# Altium PCB jetson_nano_breakout_rev1.PcbDoc
Units mil, origin at the board's own origin, x right, y up, seen from the top; angles counter-clockwise.
Board outline 3926.51 x 3520 mil, 2 copper layers (Top Layer, Bottom Layer); 35 components, 48 nets, 168 pads, 31 vias.
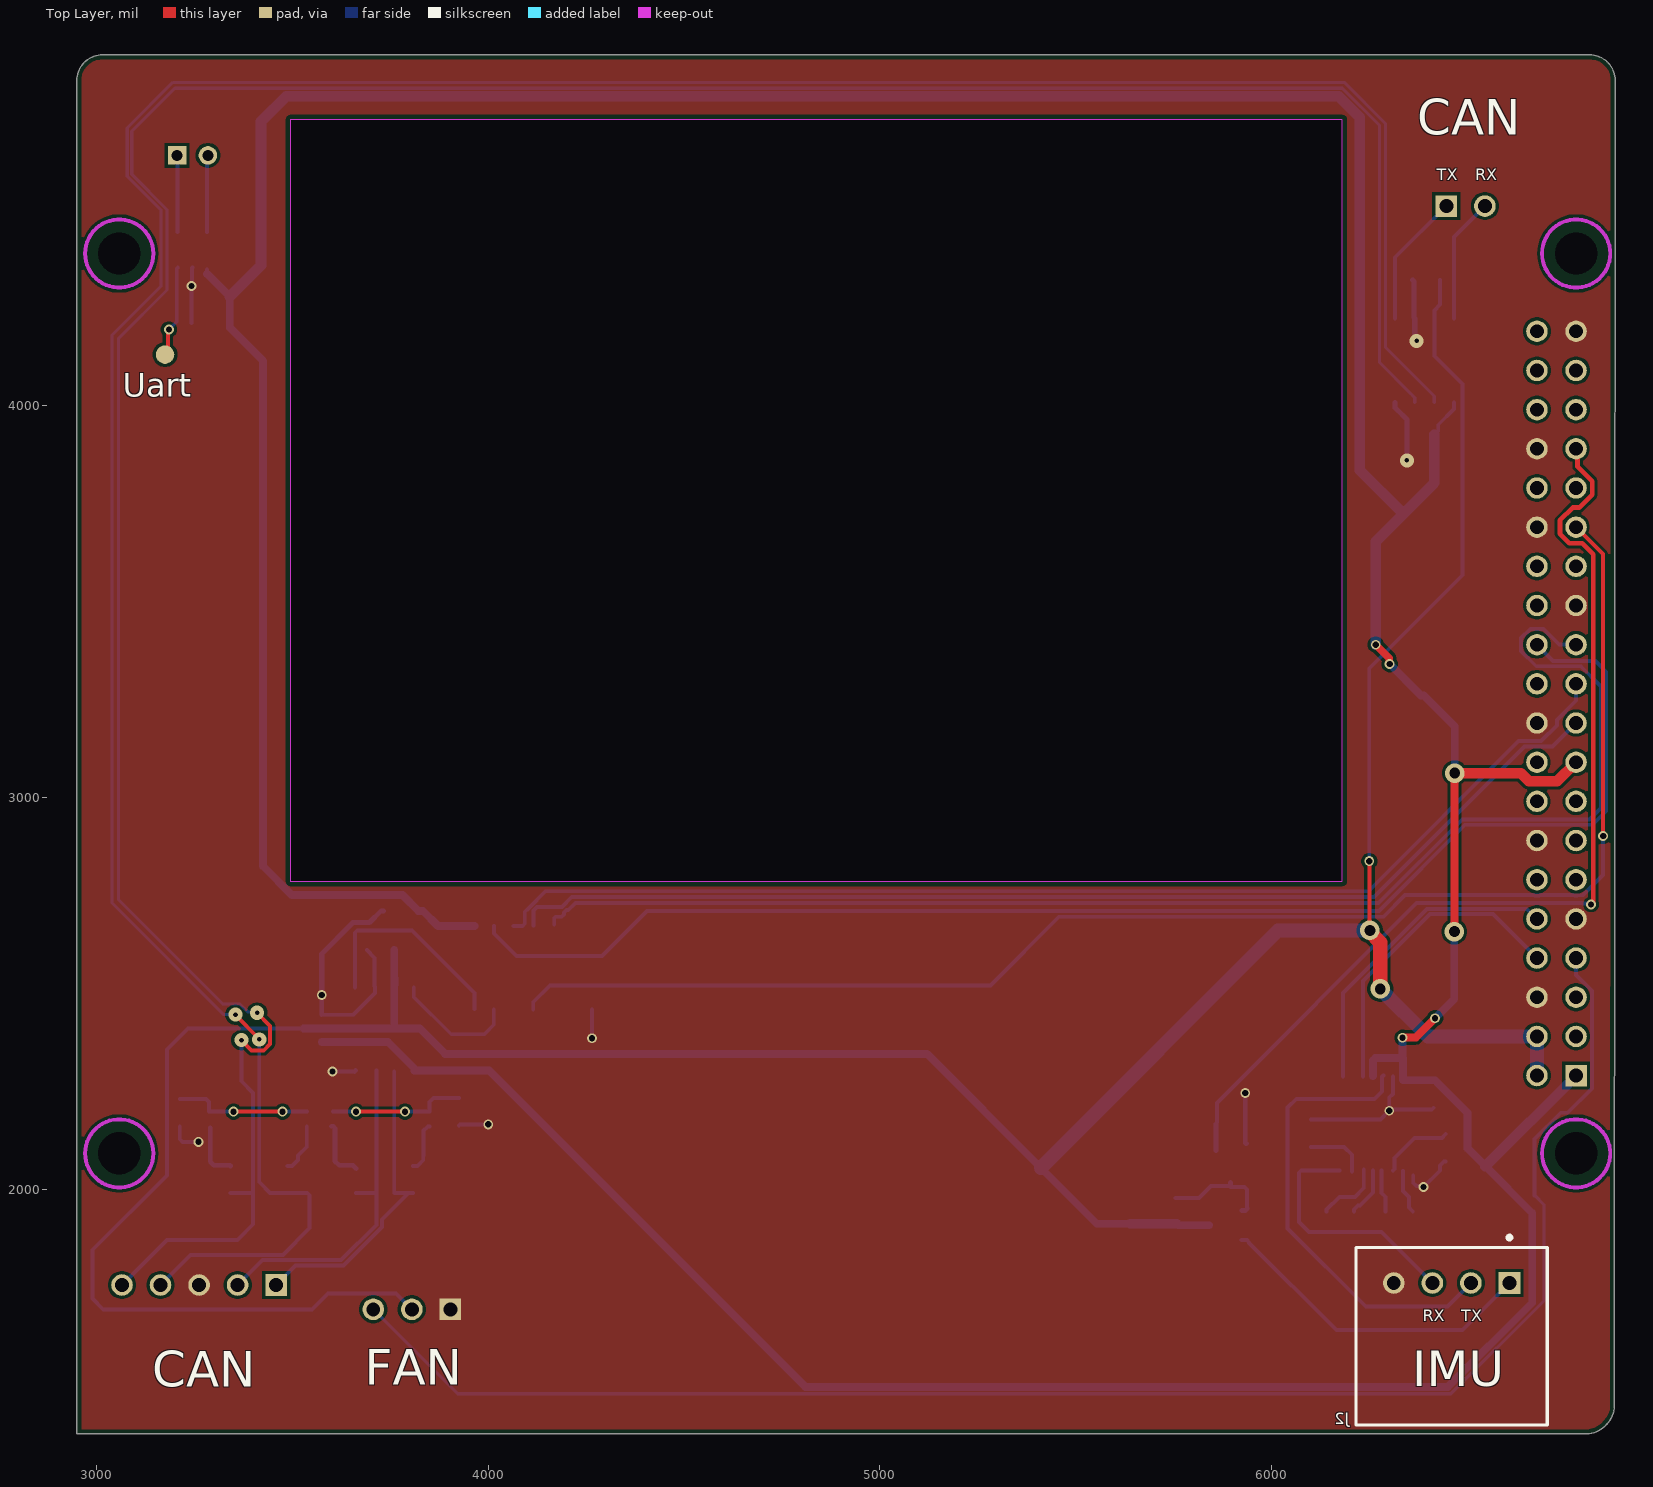
[diagram p0: Top Layer view]
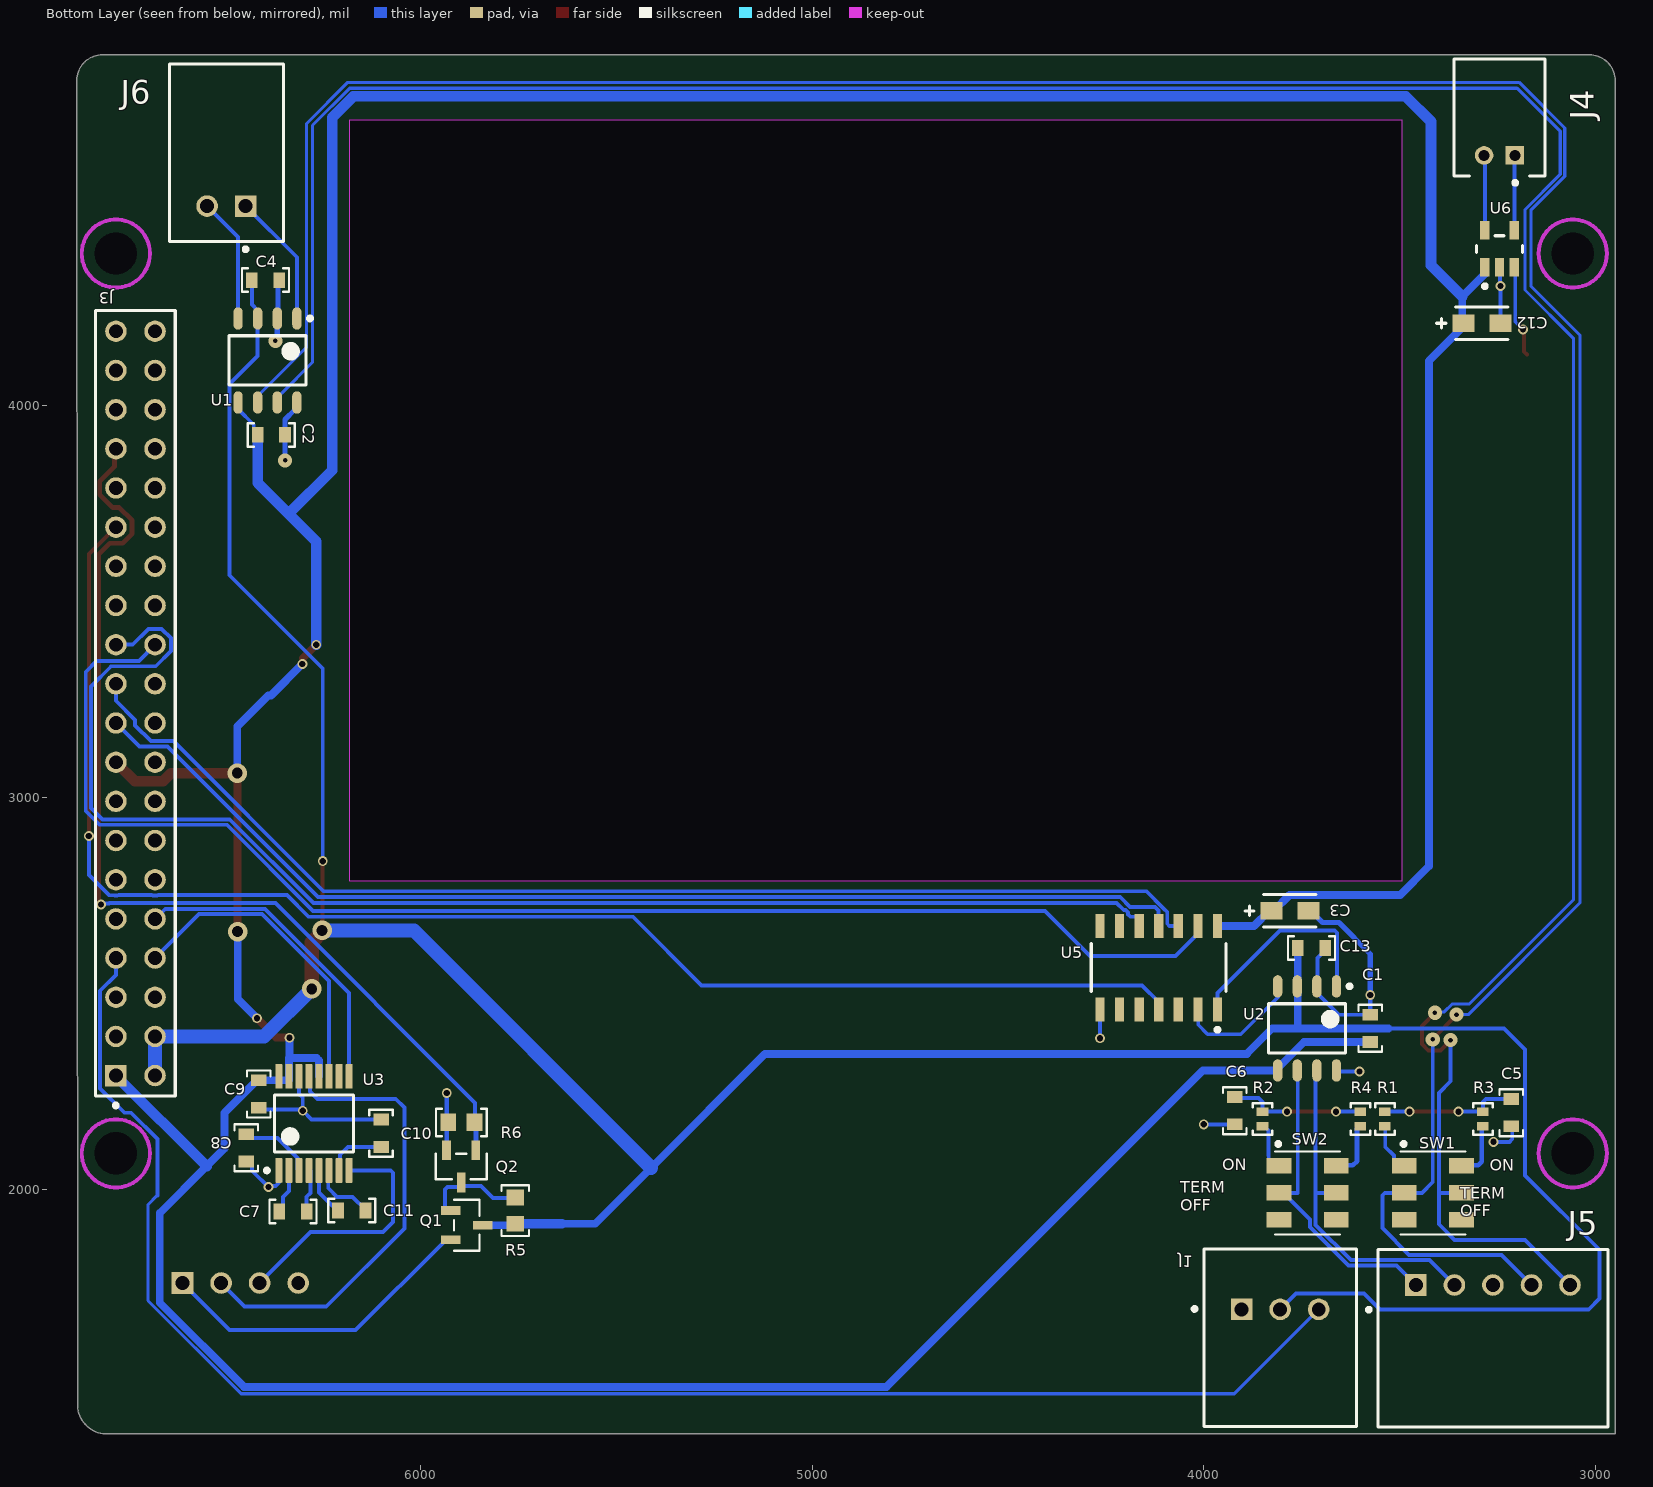
[diagram p1: Bottom Layer view, seen from below]
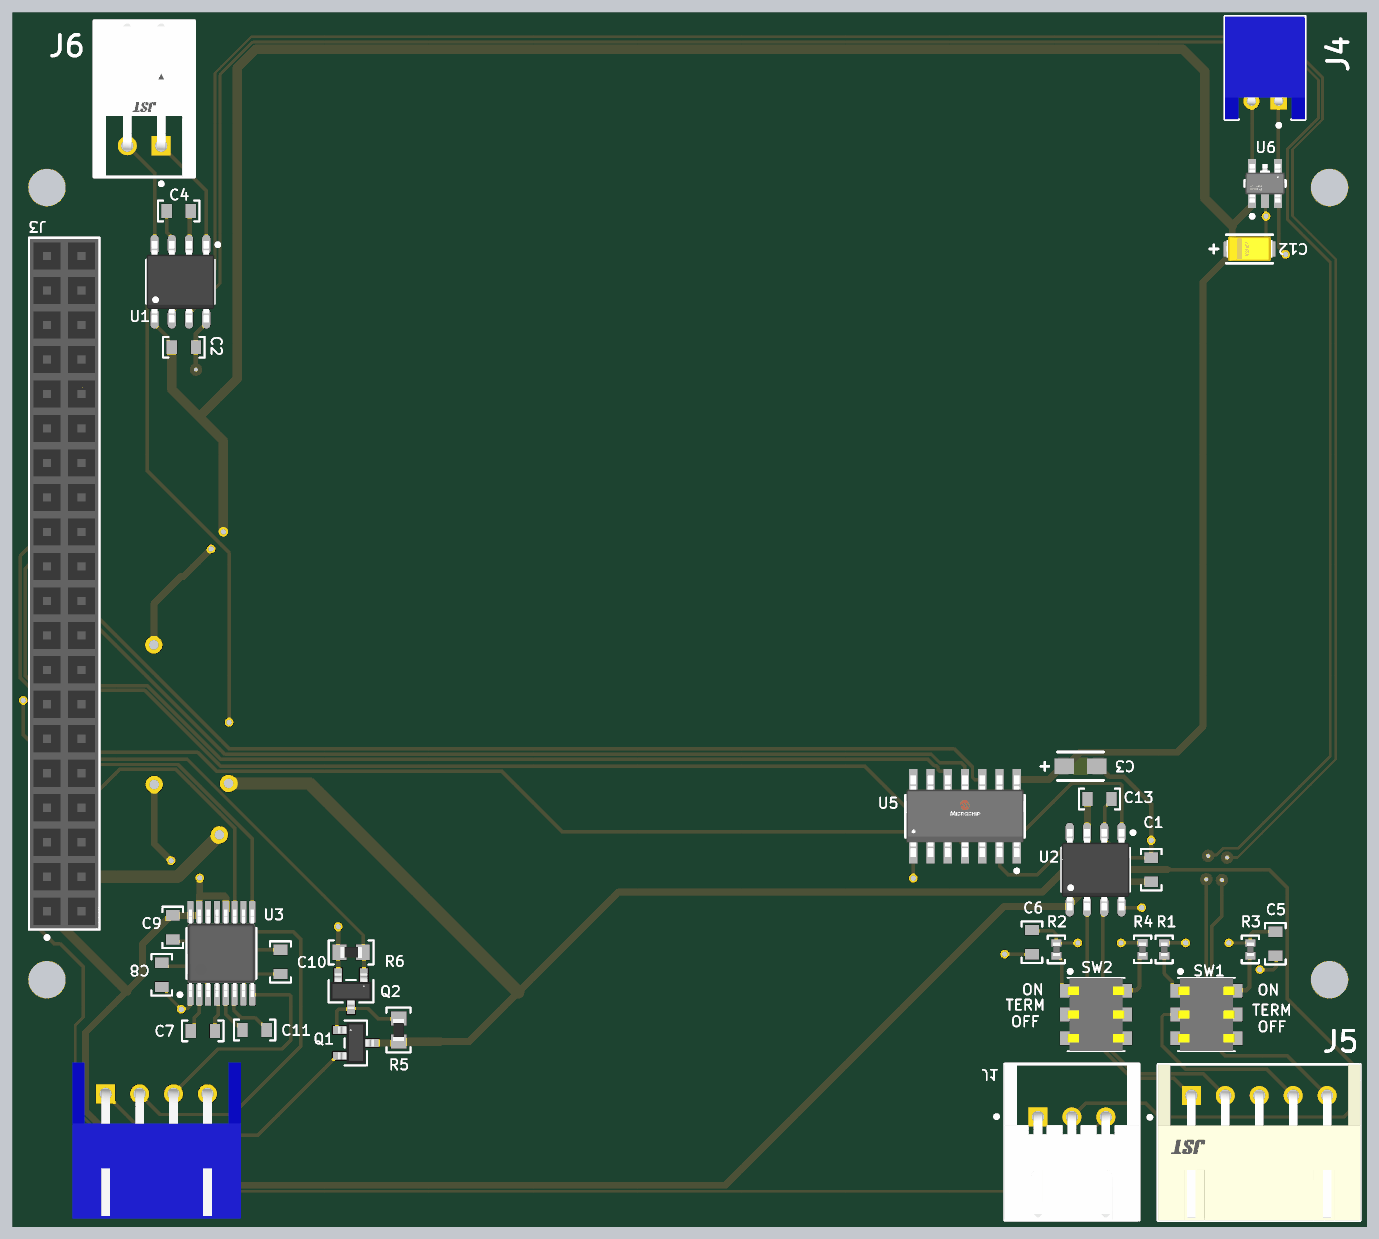
[diagram p2: 3D render of the assembled board from below, using the file's embedded part models]

## Layer stack, top to bottom
Top Solder: solder mask 0.4, Solder Resist, Dk 3.5
Top Layer: signal copper 1.4
Dielectric 1: dielectric 12.6, FR-4, Dk 4.8
Bottom Layer: signal copper 1.4
Bottom Solder: solder mask 0.4, Solder Resist, Dk 3.5

## Board outline
3015,4895 ccw(c3015,4830) 2950,4830 2950,1375 6810,1375 ccw(c6797.61,1452.38) 6874.99,1439.99 6876.5,4830.49 ccw(c6812,4830.5) 6812,4895
cut-out: 3495,4730 3495,2785 6180,2785 6180,4730

## Design rules (kind name [scope] priority, off if disabled: settings)
AcuteAngle [All] p1: minimum=8.00000000000000E+0001 checktracksonly=FALSE
BoardOutlineClearance "BoardOutlineClearance JLCPCB" [All] p1: gap=11.81 ignorepadtopadclearanceinfootprint=FALSE
Clearance "Clearance JLCPCB 4 layer" [All] p1: gap=7.87 ignorepadtopadclearanceinfootprint=FALSE except(3.54: Arc-Arc Arc-Track Track-Track; 5: Arc-SMDPad Arc-Via Track-SMDPad Track-Via SMDPad-SMDPad; 9.45: THPad-THPad THPad-Via Via-Via; 10: Arc-Hole Track-Hole SMDPad-Hole THPad-Hole Via-Hole Fill-Hole Poly-Hole Region-Hole Text-Hole)
DiffPairsRouting "Diff Pairs USB 2.0" [InDifferentialPairClass('USB 2.0')] p1: maxlimit=5 minlimit=5 mostfreqgap=5 toplayer_minwidth=7.87 toplayer_maxwidth=7.87 toplayer_prefwidth=7.87 bottomlayer_minwidth=7.87 bottomlayer_maxwidth=7.87 bottomlayer_prefwidth=7.87 impedanceprofiledriven=TRUE impedanceprofileid={9C1C01C3-81FD-4AE1-9E3D-BC841176F5CA} maxuncoupledlength=500
DiffPairsRouting "Diff Pairs PCIe Gen 2" [InDifferentialPairClass('PCIe Gen 2')] p2: maxlimit=5 minlimit=5 mostfreqgap=5 toplayer_minwidth=5.53 toplayer_maxwidth=5.53 toplayer_prefwidth=5.53 bottomlayer_minwidth=5.53 bottomlayer_maxwidth=5.53 bottomlayer_prefwidth=5.53 impedanceprofiledriven=TRUE impedanceprofileid={D86E5A41-F98B-413D-93FD-A6E48D035561} maxuncoupledlength=500
HoleSize "HoleSize JLCPCB Pad" [IsPad] p1: absolutevalues=TRUE maxlimit=248.03 minlimit=19.68 maxpercent=80.000 minpercent=20.000
HoleSize "HoleSize JLCPCB 4 layer Cheap" [All] p2: absolutevalues=TRUE maxlimit=248.03 minlimit=11.81 maxpercent=80.000 minpercent=20.000
HoleToHoleClearance "HoleToHoleClearance JLCPCB Same Net" [All] p1: gap=10 allowstackedmicrovias=TRUE
MinimumAnnularRing "MinimumAnnularRing JLCPCB Via" [All] p1: minimumring=2.95
MinimumAnnularRing "MinimumAnnularRing JLCPCB Pad" [IsPad] p2: minimumring=9.84
MinimumAnnularRing "MinimumAnnularRing JLCPCB 1oz" [All] p3: minimumring=5.12
MinimumSolderMaskSliver "MinimumSolderMaskSliver JLCPCB" [All] p1: minsoldermaskwidth=3.94
PlaneClearance [All] p1: clearance=11.81
PlaneConnect [All] p1: planeconnectstyle=Direct reliefexpansion=20 reliefentries=4 reliefconductorwidth=10 reliefairgap=10
PolygonConnect [All] p1: connectstyle=Direct reliefconductorwidth=15 reliefentries=4 polygonreliefangle="45 Angle" airgapwidth=10
RoutingVias "RoutingVias JLCPCB 4 layer" [All] p1: holewidth=19.68 width=39.37 viastyle="Through Hole" minholewidth=11.81 minwidth=17.72 maxholewidth=50 maxwidth=80 useviatemplates=TRUE viatemplateguid#1={E4F56293-08C2-4D19-82C4-AE08438917D5} viatemplateguid#2={1BCA9F14-5F09-4202-A85E-663B4EEF2BCF} viatemplateguid#3={0A06A7A9-53EB-413F-AE2C-1D9530B3FFA7} viatemplatename#1=v64h41 viatemplatename#2=v127h71 viatemplatename#3=v274h274
SilkToSilkClearance [All] p1: silktosilkclearance=3
SilkToSolderMaskClearance "SilkToSolderMaskClearance JLCPCB" [IsPad] p1: minsilkscreentomaskgap=5.91 clearancetoexposedcopper=TRUE
SolderMaskExpansion "SolderMaskExpansion JLCPCB" [All] p1: expansion=1.5 istentingtop=FALSE
SupplyNets "Schematic Supply Nets_2" [InNet('+5')] p1: voltage=0.000
SupplyNets "Schematic Supply Nets_1" [InNet('3v3')] p2: voltage=0.000
SupplyNets "Schematic Supply Nets" [InNet('GND')] p3: voltage=0.000
UnRoutedNet [All] p1: checkbadconnections=TRUE
Width "Width JLCPCB 4 layer" [All] p1: maxlimit=196.85 minlimit=3.54 preferedwidth=9.84 minimp=50.000000 maximp=50.000000 favimp=50.000000
21 further rules are at their usual default settings.

## Components (designator, comment, footprint, x,y, rotation, side; value= is the part's Value field where it differs from the comment)
C1 "1uF Ceramic 16V" CAPACITOR_0603 3575,2410 r90 bottom value=1uF
C2 "1uF Ceramic 16V" CAPACITOR_0603 6380,3925 r180 bottom value=1uF
C3 "10uF Ceramic 6.3V" CAPACITOR_0603 3725,2615 r180 bottom
C4 "10uF Ceramic 6.3V" CAPACITOR_0603 6395,4320 r180 bottom
C5 "10nF Ceramic 6.3V" CAPACITOR_0603 3215,2195 r90 bottom value=10nF
C6 "10nF Ceramic 6.3V" CAPACITOR_0603 3921.01,2200 r90 bottom value=10nF
C7 "100nF Ceramic 6.3V" CAPACITOR_0603 6325,1942.5 r180 bottom value=0.1uF
C8 "100nF Ceramic 6.3V" CAPACITOR_0603 6444.29,2105 r270 bottom value=0.1uF
C9 "100nF Ceramic 6.3V" CAPACITOR_0603 6412.5,2242.5 r270 bottom value=0.1uF
C10 "100nF Ceramic 6.3V" CAPACITOR_0603 6100,2142.5 r90 bottom value=0.1uF
C11 "100nF Ceramic 6.3V" CAPACITOR_0603 6175,1945 r180 bottom value=0.1uF
C12 "T491A104K035AT" FP-T491A104K035AT-MFG 3290,4210 r0 bottom
C13 "T491A104K035AT" FP-T491A104K035AT-MFG 3780,2710 r0 bottom
J1 "S3B-XH-A-1(LF)(SN)" FP-S3B-XH-A-1_LF_SN-MFG 3805,1620 r0 bottom
J2 "S4B-XH-A(LF)(SN)" JST-S4B-XH-A(LF)(SN)_V 6459.21,1760 r180 top
J3 "7-534206-0" FP-7-534206-0-MFG 6727,3239.5 r90 bottom
J4 "S2B-PH-K-S(LF)(SN)" JST-S2B-PH-K-S_V 3245,4735 r0 bottom
J5 "S5B-XH-A(LF)(SN)" FP-S5B-XH-A_LF_SN-MFG 3261.85,1619.17 r0 bottom
J6 "S2B-XH-A-GU" FP-S2B-XH-A-GU-MFG 6495,4645 r0 bottom
Q1 "MOSFET N-CH 30V 5.8A SOT-23-3" SOT-23-3 5881.35,1907.5 r270 bottom
Q2 "MOSFET N-CH 30V 5.8A SOT-23-3" SOT-23-3 5895.48,2057.5 r0 bottom
R1 "60.4 Ohm 1% 1/16W" RESISTOR_0402 3537.5,2178.7 r90 bottom
R2 "60.4 Ohm 1% 1/16W" RESISTOR_0402 3850,2178.7 r90 bottom
R3 "60.4 Ohm 1% 1/16W" RESISTOR_0402 3287.5,2178.7 r90 bottom
R4 "60.4 Ohm 1% 1/16W" RESISTOR_0402 3600,2178.8 r90 bottom
R5 "10k Ohm 5% 1/10W" RESISTOR_0603 5757.5,1945 r90 bottom
R6 "10k Ohm 5% 1/10W" RESISTOR_0603 5895,2170 r0 bottom
SW1 "Switch DPDT" CAS-220TA 3415,1990 r270 bottom
SW2 "Switch DPDT" CAS-220TA 3735,1990 r270 bottom
U1 "CAN Transceiver" SOIC-8 6390,4115 r270 bottom
U2 "CAN Transceiver" SOIC-8 3736.32,2410 r270 bottom
U3 "SN65C3221EPWR" PW0016A_M 6271.36,2167.5 r90 bottom
U5 "MCP2517FD-H/SL" FP-C04-065-SL-MFG 4115,2565 r90 bottom
U6 "ISL3280EIHZ-T" FP-P5_064-MFG 3245,4400 r90 bottom
Uart "Comment" TESTPOINT_1.2MM 3175,4130 r0 top

## Footprints (in the part's own frame and the unit in brackets; to place one, negate y for a bottom-side part, rotate by r counter-clockwise, add the part's x,y. Pads: shape width x height; smd on the part's side, far side on the other; paste and mask are expansions set on the pad)
CAPACITOR_0603 [mil] "CAPACITOR 0603"
  rect 30x40 smd: 1(-35,0) 2(35,0)
  silkscreen extent -60,-30 60,30, body extent -94,-16 -31,16, height 31
CAS-220TA [mm] "SWITCH SLIDE DPDT 100MA 6V"
  rrect0% 1x1.6 smd: 1(-1.75,-1.85) 2(0,-1.85) 3(1.75,-1.85) 4(-1.75,1.85) 5(0,1.85) 6(1.75,1.85)
  silkscreen extent -3.3,-2.1 2.7,2.1, body extent -2.7,-2.1 2.7,2.1, height 5.01
FP-7-534206-0-MFG [mm]
  rect 1.39x1.39 hole 0.89 paste-2539.97 mask+0: 1(-24.13,1.27)
  round 1.39 hole 0.89 paste-2539.97 mask+0: 2(-24.13,-1.27) 3(-21.59,1.27) 4(-21.59,-1.27) 5(-19.05,1.27) 6(-19.05,-1.27) 7(-16.51,1.27) 8(-16.51,-1.27) 9(-13.97,1.27) 10(-13.97,-1.27) 11(-11.43,1.27) 12(-11.43,-1.27) 13(-8.89,1.27) 14(-8.89,-1.27) 15(-6.35,1.27) 16(-6.35,-1.27) 17(-3.81,1.27) 18(-3.81,-1.27) 19(-1.27,1.27) 20(-1.27,-1.27) 21(1.27,1.27) 22(1.27,-1.27) 23(3.81,1.27) 24(3.81,-1.27) 25(6.35,1.27) 26(6.35,-1.27) 27(8.89,1.27) 28(8.89,-1.27) 29(11.43,1.27) 30(11.43,-1.27) 31(13.97,1.27) 32(13.97,-1.27) 33(16.51,1.27) 34(16.51,-1.27) 35(19.05,1.27) 36(19.05,-1.27) 37(21.59,1.27) 38(21.59,-1.27) 39(24.13,1.27) 40(24.13,-1.27)
  silkscreen extent -26.19,-2.58 25.47,2.58, body extent -25.4,-2.52 25.4,2.52, height 8.64
FP-C04-065-SL-MFG [mm]
  rect 1.55x0.6 smd paste+0 mask+0: 1(-2.7,-3.81) 2(-2.7,-2.54) 3(-2.7,-1.27) 4(-2.7,0) 5(-2.7,1.27) 6(-2.7,2.54) 7(-2.7,3.81) 8(2.7,3.81) 9(2.7,2.54) 10(2.7,1.27) 11(2.7,0) 12(2.7,-1.27) 13(2.7,-2.54) 14(2.7,-3.81)
  silkscreen extent -4.15,-4.38 1.55,4.38, body extent -3,-4.33 3,4.33, height 1.75
FP-P5_064-MFG [mm]
  rect 1.2x0.6 smd paste+0 mask+0: 1(-1.2,0.95) 2(-1.2,0) 3(-1.2,-0.95) 4(1.2,-0.95) 5(1.2,0.95)
  silkscreen extent -2.55,-1.5 0.85,1.5, body extent -1.42,-1.45 1.42,1.45, height 1.45
FP-S2B-XH-A-GU-MFG [mm]
  rect 1.4x1.4 hole 0.9 paste-2539.97 mask+0: 1(-1.25,3.45)
  round 1.4 hole 0.9 paste-2539.97 mask+0: 2(1.25,3.45)
  silkscreen extent -3.7,-5.75 3.7,6.37, body extent -3.7,-5.75 3.7,5.75, height 5.95
FP-S3B-XH-A-1_LF_SN-MFG [mm]
  rect 1.4x1.4 hole 0.9 paste-2539.97 mask+0: 1(2.5,-1.85)
  round 1.4 hole 0.9 paste-2539.97 mask+0: 2(0,-1.85) 3(-2.5,-1.85)
  silkscreen extent -4.95,-5.75 5.68,5.75, body extent -4.95,-5.75 4.95,5.75, height 6.1
FP-S5B-XH-A_LF_SN-MFG [mm]
  rect 1.4x1.4 hole 0.9 paste-2539.97 mask+0: 1(5,-3.45)
  round 1.4 hole 0.9 paste-2539.97 mask+0: 2(2.5,-3.45) 3(0,-3.45) 4(-2.5,-3.45) 5(-5,-3.45)
  silkscreen extent -7.45,-5.75 8.18,5.75, body extent -7.45,-5.75 7.45,5.75, height 6.15
FP-T491A104K035AT-MFG [mm]
  rect 1.42x1.13 smd paste+0 mask+0: 1(-1.2,0) 2(1.2,0)
  silkscreen extent -1.7,-1.05 2.93,1.05, body extent -1.7,-0.9 1.7,0.9, height 1.8
JST-S2B-PH-K-S_V [mm] "THD, 2-Leads, Body 7.6x5.9mm, Pitch 2mm"
  rect 1.2x1.2 hole 0.7: 1(-1,2.45)
  round 1.2 hole 0.7: 2(1,2.45)
  silkscreen extent -2.95,-3.8 2.95,4.35, body extent -2.95,-3.8 2.95,3.8, height 4.8
JST-S4B-XH-A(LF)(SN)_V [mm] "Header, 4-Leads, Body 12.4x11.5mm, Pitch 2.5mm"
  rect 1.4x1.4 hole 0.9: 1(-3.75,0)
  round 1.4 hole 0.9: 2(-1.25,0) 3(1.25,0) 4(3.75,0)
  silkscreen extent -6.2,-3.08 6.2,9.2, body extent -6.2,-2.3 6.2,9.2, height 3.4
PW0016A_M [mm] "SOP, 16-Leads, Body 5.1x4.5mm, Pitch 0.65mm, IPC Low Density"
  rrect22% 1.6x0.45 smd: 1(-3.05,2.275) 2(-3.05,1.625) 3(-3.05,0.975) 4(-3.05,0.325) 5(-3.05,-0.325) 6(-3.05,-0.975) 7(-3.05,-1.625) 8(-3.05,-2.275) 9(3.05,-2.275) 10(3.05,-1.625) 11(3.05,-0.975) 12(3.05,-0.325) 13(3.05,0.325) 14(3.05,0.975) 15(3.05,1.625) 16(3.05,2.275)
  silkscreen extent -3.17,-2.55 1.85,3.18, body extent -3.21,-2.5 3.21,2.5, height 1
RESISTOR_0402 [mm] "Resistor 0402"
  rect 0.55x0.75 smd: 1(-0.475,0) 2(0.475,0)
  silkscreen extent -1.02,-0.64 1.02,0.64, body extent -0.5,-0.25 0.5,0.25, height 0.25
RESISTOR_0603 [mil] "Resistor 0603"
  rect 40x45 smd: 1(-33.5,0) 2(33.5,0)
  silkscreen extent -65,-35 65,35, body extent -31,-16 31,16, height 16
SOIC-8 [mm] "SOIC, 8-Leads, Body 4.90x3.90mm, Pitch 1.27mm, IPC Medium Density"
  oval 1.45x0.6 smd: 1(-2.725,1.905) 2(-2.725,0.635) 3(-2.725,-0.635) 4(-2.725,-1.905) 5(2.725,-1.905) 6(2.725,-0.635) 7(2.725,0.635) 8(2.725,1.905)
  silkscreen extent -2.85,-2.5 1.6,2.88, body extent -3,-2.5 3,2.5, height 1.75
SOT-23-3 [mil]
  rect 22x50 smd paste+0 mask+4: 1(-37.5,-41) 2(37.5,-41) 3(0,41)
  silkscreen extent -65,-33 65,33, body extent -60,-52 60,52, height 44
TESTPOINT_1.2MM [mm]
  round 1.2 smd: TP(0,0)

## Part data
C1 C2: library part CAPACITOR_1uF_0603, "Cap 1uF 16V +/-10% / Ceramic 0603", Supplier Part Number 1=399-7847-1-ND, Tolerance="+/- 10%", Voltage=16V, Made By="Flip B", Supplier 1=Digi-Key
C3 C4: library part CAPACITOR_10uF_0603, "Cap 10uF 6.3V +/-20% / Ceramic 0603", Supplier Part Number 1=1276-1119-1-ND, Tolerance="+/- 20%", Value (uF)="10 uF", Voltage=6.3V, ComponentLink1Description=Digikey, ComponentLink1URL=https://www.digikey.com/en/products/detail/samsung-electro-mechanics/CL10A106MQ8NNNC/3886777, Made By="Flip B", Supplier 1=Digi-Key
C5 C6: library part CAPACITOR_0.01uF_0603, "Cap 10nF 6.3V +/-20% / Ceramic 0603", Supplier Part Number 1=80-C0603C103K9R, Tolerance="+/- 10%", Voltage=6.3V, ComponentLink1Description=Datsheet, ComponentLink1URL=https://www.mouser.com/datasheet/2/212/KEM_C1002_X7R_SMD-1102033.pdf, Made By="Flip B", Supplier 1=Mouser
C7 C8 C9 C10 C11: library part CAPACITOR_0.1uF_0603, "Cap 100nF 6.3V +/-10% / Ceramic 0603", Supplier Part Number 1=399-15351-1-ND, Tolerance="+/- 10%", Voltage=6.3V, ComponentLink1Description=Datsheet, ComponentLink1URL=https://www.mouser.com/datasheet/2/212/KEM_C1002_X7R_SMD-1102033.pdf, Made By="Flip B", Supplier 1=Digi-Key
C12 C13: library part CMP-03017-000018-1, "CAP TANT 0.1UF 10% 35V 1206", Capacitance=100nF, Case Code (Imperial)=1206, Case Code (Metric)=3216, Dielectric Material=Tantalum, ESR (Equivalent Series Resistance)=20R, Leakage Current=500nA, Max Operating Temperature=125°C, Min Operating Temperature=-55°C, Package Quantity=1, Ripple Current=61mA, Tolerance=10%, Voltage=35V, Case/Package=1206, Construction=Flat, Depth=1.6mm, Dissipation Factor=4%, Features="General Purpose", Height=1.6mm, Height - Seated (Max)=0.071inch, Lead Free="Lead Free", Lead Pitch=1.2mm, Length=3.2mm, Life (Hours)=2000Hour, Mount="Surface Mount", Number of Pins=2, Packaging="Tape and Reel", Polarity=Polar, Radiation Hardening=No, REACH SVHC="No SVHC", RoHS Compliant=Yes, Series=T491, Size=1.6mm, Termination=SMD/SMT, Voltage Rating=35V, Voltage Rating (DC)=35V, Weight=0.000571oz, Width=1.6mm
J1: library part CMP-17439-000427-1, "CONN HEADER R/A 3POS 2.5MM", Color=Natural, Flammability Rating="UL94 V-0", Max Operating Temperature=85°C, Min Operating Temperature=-25°C, Package Quantity=1000, Voltage Rating=250V, Connector Type=Header, Contact Finish - Mating=TIN, Contact Material=Brass, Contact Plating=Tin, Contact Shape=Square, Contact Type="Male Pin", Fastening Type=Detent, Insulation Color=Natural, Insulation Material=Nylon, Lead Free="Lead Free", Mount="Through Hole", Number of Positions=3, Number of Rows=1, Packaging=Bulk, Pitch=0.098inch, Series=XH, Termination=Press-Fit
J2: library part CMP-1755-00007-1, "Male Header, Pitch 2.5 mm, 1 x 4 Position, Height 6.1 mm, Tail Length 3.4 mm, -25 to 85 degC, RoHS, Bulk", ComponentLink1Description="Manufacturer URL", ComponentLink1URL=http://www.jst.com/home2.html, ComponentLink2Description=Datasheet, ComponentLink2URL=http://www.jst-mfg.com/product/pdf/eng/eXH.pdf, DatasheetVersion=May-16, PackageDescription="Male Header, Pitch 2.5 mm, 1 x 4 Position, Height 6.1 mm, Tail Length 3.4 mm", PackageReference=S4B-XH-A(LF)(SN)
J3: library part CMP-03369-000068-1, "CONN RCPT 40POS 0.1 GOLD PCB", Current Rating=2A, Manufacturer="TE Connectivity", Temperature="-65°C to +105°C", Temperature Range High=+105°C, Temperature Range Low=-65°C, Voltage Rating=333V, Automotive=No, Category=Conn, ComponentLink2Description=Datasheet, ComponentLink2URL=https://octopart.com/datasheet/7-534206-0-te+connectivity-39516831, Conn Gender=Female, Conn Orientation=Vertical, Contact Material=Gold,Nickel, Device Class L1=Connectors, Device Class L2="Headers and Wire Housings", Device Class L3=unset, Digikey Description="CONN RCPT 40POS 0.1 GOLD PCB", Footprint Url=https://www.mouser.in/datasheet/2/418/NG_CD_534206_R7-1252933.pdf, Height=8.9mm, Is Female=yes, Lead Free=Yes, Manufacturer Part Number=7-534206-0, Mouser Description="Headers & Wire Housings REC 2X20P VRT T/H", Number of Contacts=40, Number of Rows=2, Octopart=https://octopart.com/7-534206-0-te+connectivity-39516831, Package=7-534206-0, Pitch=2.54mm, RoHS=TRUE, Standoff Height=0.38mm
J4: library part CMP-1755-00004-1, "Male Header, Pitch 2 mm, 1 x 2 Position, Height 4.8 mm, Tail Length 3.4 mm, -25 to 85 degC, RoHS, Bulk", Capacitance="10 uF", Case\Package=Radial, Max Operating Temperature="85 degC", Min Operating Temperature="-40 degC", Package Quantity=200, Tolerance=20%, Voltage Rating="50 V", ComponentLink1Description=Datasheet, ComponentLink1URL=http://www.jst-mfg.com/product/pdf/eng/ePH.pdf, DatasheetVersion=Dec-12, Diameter="5 mm", Height="11 mm", Lead Pitch="2 mm", Length="11 mm", Mount="Through Hole", PackageDescription="Male Header, Pitch 2 mm, 1 x 2 Position, Height 4.8 mm, Tail Length 3.4 mm", PackageReference=S2B-PH-K-S, Packaging=Bulk, Pins=2, Radiation Hardening=No, REACH SVHC="No SVHC", RoHSCompliant=true, Voltage Rating (DC)="50 V"
J5: library part CMP-17439-000302-1, "CONN HEADER R/A 5POS 2.5MM", Color=Natural, Contact Resistance=10mR, Current Rating=3A, Flammability Rating="UL94 V-0", Insulation Resistance=1GR, Max Operating Temperature=85°C, Min Operating Temperature=-25°C, Voltage Rating=250V, Connector Type=Header, Contact Finish - Mating=TIN, Contact Material=Brass, Contact Plating=Tin, Contact Shape=Square, Contact Type="Male Pin", Fastening Type=Detent, Insulation Color=Natural, Insulation Material=Nylon, Lead Free="Lead Free", Lead Pitch=2.5mm, Mount="Through Hole", Number of Contacts=5, Number of Positions=5, Number of Rows=1, Orientation="Right Angle", Packaging=Bulk, Pitch=2.5mm, REACH SVHC="No SVHC", Series=XH, Termination=Solder, Voltage Rating (AC)=250V, Wire/Cable Gauge=22AWG
J6: library part CMP-17439-000226-1, "Conn Shrouded Header HDR 2 POS 2.45mm Solder ST Top Entry Thru-Hole", Lead Free="Lead Free"
Q1 Q2: library part AO3404A, "N-Channel 30 V 5.8A (Ta) 1.4W (Ta) Surface Mount SOT-23-3", Amp Rating="5.8 A", Package=SOT23-3L, Power Dissipation="1.4W (Ta)", Supplier Part Number 1=785-1004-1-ND, Created by="Dylan T", FET Type=N-Channel, Manufacturer _Part_Number=AO3404A, Rds (on)="28mOhm @ 5.8A, 10V", SourceLibrary=ON_Semiconductor_2020-01-13, Supplier 1=Digi-Key, Vdss=30V, Vendor="Alpha & Omega Semiconductor Inc.", Vgs (Max)="3V @ 5.8A, 10V", Vgs (th)="3V @ 250µA"
R1 R2 R3 R4: library part RESISTOR_60.4_0402, "RES 60.4 OHM 1% 1/16W 0402", Digikey Part Numer=CR0603-JW-104ELFTR-ND, Supplier Part Number 1=13-AC0402FR-0760R4LCT-ND, Tolerance="+/- 1%", Value  (Ohms)=60.4, Made By="Robert Pafford", Supplier=Digikey, Supplier 1=Digi-Key, Wattage=1/16W
R5 R6: library part RESISTOR_10K_0603, "RES 10k OHM 5% 1/10W 0603", Digikey Part Numer=CR0603-JW-104ELFTR-ND, Supplier Part Number 1=2019-RK73B1JTTD103JCT-ND, Tolerance="+/- 5%", Value  (Ohms)=10K, ComponentLink1Description=Datasheet, ComponentLink1URL=https://www.bourns.com/docs/product-datasheets/CRxxxxx.pdf, Made By="Robert Pafford", Supplier=Digikey, Supplier 1=Digi-Key, Wattage=1/8W
SW1 SW2: library part CAS-220TA_CAN_TERM, "GOLD SWITCH FLUSH SLIDE DPDT 100MA 6V", Current Rating="100 mA", Supplier Part Number 1=CAS220JCT-ND, Voltage Rating=6VDC, Contact Finish=Gold, Made By="Robert Pafford", Supplier 1=Digi-Key, Switch Function=DPDT
U1 U2: library part TJA1442AT, "CAN Interface IC High-Speed CAN Transceiver with Standby Mode", Supplier Part Number 1=771-TJA1442AT/0Z, Made By="Robert Pafford", Max Data Rate=5Mbps, Supplier 1=Mouser
U3: library part CMP-0299-01595-2, "3-V to 5.5-V Single-Channel RS-232 1-Mbit/s Line Driver / Receiver with ±15-kV IEC ESD Protection, -40 to 85 degC, 16-Pin SSOP (DB), Green (RoHS & no Sb/Br)", Drivers Per Package=1, Supply Voltage(s)(V)="3.3 or 5.0", ComponentLink1Description="Manufacturer URL", ComponentLink1URL=www.ti.com, ComponentLink2Description=Datasheet, ComponentLink2URL=http://www.ti.com/general/docs/lit/getliterature.tsp?genericPartNumber=SN65C3221E&fileType=pdf, ComponentLink3Description="Package Specification", ComponentLink3URL=http://www.ti.com/litv/pdf/mpds361, DatasheetVersion=SLLS694B, ESD HBM(kV)=+/-15, ICC(Max)(mA)=1, IEC-61000-4-2 SUPPORT=TRUE, PackageDescription="16-Pin Plastic Thin Small Outline Package 5 x 4.4 mm Body ,0.65 mm Pitch", PackageReference=PW0016A, PackageVersion="revG, Feb-2011", Receivers Per Package=1, RS-232=TRUE, Single Supply=TRUE, SubFamily=RS-232
U5: library part CMP-06298-000003-1, "IC CANBUS CONTROLLER SPI 14SOIC", Ambient Temperature Range High=+150°C, Ambient Temperature Range Low=-40°C, Manufacturer=Microchip, Max Junction Temp=+165°C, Max Supply Voltage=5.5V, Min Supply Voltage=2.7V, Nominal Supply Current=15mA, Package=C04-065-SL, Temperature="-40°C to +150°C", Automotive=No, Category=IC, ComponentLink2Description=Datasheet, ComponentLink2URL=http://ww1.microchip.com/downloads/en/DeviceDoc/MCP2517FD-External-CAN-FD-Controller-with-SPI-Interface-20005688B.pdf, Device Class L1="Integrated Circuits (ICs)", Device Class L2="Interface ICs", Device Class L3=Controllers, Digikey Description="IC CANBUS CONTROLLER SPI 14SOIC", Footprint Url=http://ww1.microchip.com/downloads/en/DeviceDoc/14L%20SOIC%203_90%20mm%20%28SL%29%20C04-00065d.pdf, Function=Controller, Height=1.75mm, Interface=SPI,CAN, Ipc Land Pattern Name=SOIC127P600X175-14, Lead Free=Yes, Manufacturer Part Number=MCP2517FD-H/SL, Mouser Description="Stand-Alone Can Fd Controller w/Spi Interface, 14 Soic .150in Tube", Octopart=https://octopart.com/mcp2517fd-h%2Fsl-microchip-83497369, RoHS=TRUE, Standoff Height=0.1mm, Temperature Range High=+150°C, Temperature Range Low=-40°C
U6: library part CMP-13518-000001-1, "IC RCVR ESD RS485/422 LP SOT23-5", Manufacturer=Renesas, Max Junction Temp=+150°C, Max Supply Voltage=5.5V, Min Supply Voltage=3V, Nominal Supply Current=400uA, Package=P5.064, Temperature="-40°C to +85°C", Temperature Range High=+85°C, Temperature Range Low=-40°C, Automotive=No, Category=IC, ComponentLink2Description=Datasheet, ComponentLink2URL=https://www.renesas.com/us/en/www/doc/datasheet/isl3280e-81e-82e-83e-84e-85e.pdf, Data Rate=20Mbits/s, Device Class L1="Integrated Circuits (ICs)", Device Class L2="Interface ICs", Device Class L3="RS-232 / RS-422 / RS-485 Interface ICs", Digikey Description="IC RCVR ESD RS485/422 LP SOT23-5", Height=1.45mm, Interface=RS-485,RS-422, Ipc Land Pattern Name=SOT95P280X118-5, Lead Free=Yes, Manufacturer Part Number=ISL3280EIHZ-T, Mouser Description="ISL3280E Series 20 Mbps ±16.5 kV Surface Mount RS-485/RS-422 Receiver - SOT-23-5", Number Of Receivers=1, Octopart=https://octopart.com/isl3280eihz-t-renesas-88254858, RoHS=TRUE, Simplex Duplex=Simplex, Standoff Height=0mm

## Free pads (board coordinates)
  round 0 hole 108: 3(3058,2091) 3(3058,4388) 3(6777,2091) 3(6777,4388)

## Via types
v1: diameter 25, hole 16, Top Layer to Bottom Layer, 21 vias
v2: diameter 36, hole 12, Top Layer to Bottom Layer, tented both sides, 6 vias
v3: diameter 50, hole 28, Top Layer to Bottom Layer, 4 vias

## Nets (pads, with @x,y where several pads share a name; then routed paths per layer and width w, separated by ;. In a path a pad name is that pad's centre, name@x,y a point inside that pad or via, vN(x,y) a via of type N, cw(c..) or ccw(c..) an arc to the next point about the centre after c; other vN are vias at no path point)
3v3: C1.1 C2.1 C9.1 C12.2 C13.2 J3.1 J3.17 U1.5 U2.5 U3.12 U3.15 U3.16 U5.14 U6.1 | length 13631.8
  Top Layer w20: v1(6265.5,3389.5) 6300.04,3354.96 6300.04,3340.96 v1(6301,3340) ; v1(6334,2386) 6334.96,2386.96 6367.96,2386.96 v1(6417,2436) ; v3(6466,2657) 6466.6,2657.6 6466.6,3061.2 v3(6467.2,3061.8)
  Top Layer w27: v3(6467.2,3061.8) 6635.78,3061.8 6656.81,3040.76 6728.26,3040.76 J3.17
  Bottom Layer w9.84: U6.1@3282.4,4335.94 U6.1@3282.4,4347.76 ; U2.5@3808.6,2305.43 U2.5 ; 4002.28,2302.72 4005,2300
  Bottom Layer w10: U3.12@6255,2284.72 U3.12@6258.35,2288.07 ; C2.1 6425,3935 6425,3950.98 6465,3990.98 U1.5
  Bottom Layer w20: U6.1@3282.4,4335.94 3340,4278.35 C12.2@3340,4210.71 ; C12.2@3340,4205 3340,4199.29 3425.44,4113.86 3425.44,2823.72 3498.63,2750.53 3781.01,2750.53 3821.54,2710 C13.2 3832.95,2710 3871.65,2671.3 U5.14 ; C1.1 3744.45,2375 U2.5@3809.72,2309.72 ; U2.5 4002.28,2302.72 ; 4005,2300 4810,1495 6450,1495 6665,1710 6665,1938.5 6545.5,2058 6500,2103.5 6500,2194.14 6422.5,2271.64 6422.5,2272.5 6417.5,2277.5 6336.48,2277.5 6335.33,2278.64 U3.15 6335.33,2334.07 ; U3.12@6258.35,2288.07 6258.35,2328.22 6264.21,2334.07 6335.33,2334.07 ; v1(6301,3340) 6381.08,3259.92 6388.08,3259.92 6467.2,3180.8 v3(6467.2,3061.8) ; v1(6334,2386) 6334,2335.41 6335.33,2334.07 ; v1(6417,2436) 6466,2485 v3(6466,2657)
  Bottom Layer w27: 3340,4278.35 3420,4358.35 3420,4725 3483.96,4788.96 6171.28,4788.96 6225,4735.24 6225,3835 6336.32,3723.68 ; v1(6265.5,3389.5) 6265.5,3652.87 6336.32,3723.68 ; C2.1 6415,3802.37 6336.32,3723.68 ; 6545.5,2058 J3.1
+5: C3.1 C4.1 J1.2 J3.2 J3.4 Q1.3 R5.1 U1.3 U2.3 | length 8245.1
  Top Layer w10: v1(6249,2837) 6249.75,2836.25 6249.75,2660.75 v3(6250.5,2660)
  Top Layer w36: v3(6250.5,2660) 6250.5,2656.21 6277,2629.71 v3(6277,2511)
  Bottom Layer w10: 3528.05,2410 3234.11,2410 3180,2355.89 3180,2035 2990,1845 2990,1720 3017.17,1692.83 3550,1692.83 3590.43,1733.27 3764.57,1733.27 J1.2 ; 3820,2410 3825,2410 ; v1(6249,2837) 6249,3328.97 6486.81,3566.78 6486.81,4054.7 6415,4126.51 U1.3 6415,4242.7 6430,4257.7 C4.1
  Bottom Layer w20: 3528.05,2410 3819.14,2410 ; 3760,2415.86 U2.3@3760,2517.79 ; C3.1@3760,2610 3760,2537.89 3760.62,2537.27 U2.3@3760.62,2521.92 ; 3825,2410 3890,2345 5120,2345 5410.74,2054.26 5553.5,1911.5 5638.5,1911.5 ; R5.1@5761.5,1907.5 Q1.3
  Bottom Layer w25: 5638.5,1911.5 R5.1
  Bottom Layer w36: 5410.74,2054.26 6016.47,2660 v3(6250.5,2660) ; v3(6277,2511) 6398.5,2389.5 J3.4 J3.2
can0_din: U2.4 U5.2 | length 316.4
  Bottom Layer w9.84: U2.4@3810,2514.46 3810,2490.55 3905.55,2395 3990,2395 4014.19,2419.19 U5.2@4014.19,2457.89
can0_dout: U2.1 U5.1 | length 555.2
  Bottom Layer w9.84: U2.1@3660,2514.04 3660,2654.23 3665.77,2660 3805,2660 3965,2500 U5.1
can1_din: J6.2 U1.4 | length 319.7
  Bottom Layer w10: U1.4 6465,4429.96 J6.2
can1_dout: J6.1 U1.1 | length 341.1
  Bottom Layer w10: U1.1 6315,4378.39 J6.1
GND: C1.2 C2.2 C3.2 C4.2 C5.1 C6.1 C8.2 C9.2 C10.2 C12.1 C13.1 J1.1 J2.4 J3.6 J3.9 J3.14 J3.20 J3.25 J3.30 J3.34 J3.39 J5.3 Q2.2 R6.2 U1.2 U1.8 U2.2 U2.8 U3.1 U3.14 U5.7 U6.2 | length 2074.1
  Bottom Layer w9.84: C12.1 3242.24,4210.51 v1(3242.24,4305) 3243.62,4306.38 3243.62,4351.38 U6.2 ; C1.2 3655.77,2445 ; U2.2@3711.32,2500.55 U2.2 ; C6.1@3925,2162.5 3927.5,2165 v1(4000,2165) ; v1(4265,2385) U5.7 ; C10.2 6277.5,2177.5 v1(6300,2200) ; 6425,2042.5 6429.21,2046.71 6429.21,2059.92 6439.29,2070 C8.2
  Bottom Layer w10: C5.1@3212.5,2160 3212.5,2127.37 3219.53,2120.34 v1(3260.34,2120.34) ; v1(3602.49,2299.99) U2.8@3658.59,2299.99 ; 3655.77,2445 U2.2@3711.32,2500.55 ; C3.2@3690,2610 3710,2590 U2.2@3710,2518.16 ; v1(6300,2200) 6300,2233.26 6309.74,2243 U3.14 ; v1@6303.09,2206.71 6303.09,2204.4 v1@6303.74,2203.74 ; v1@6304.62,2202.87 6407.87,2202.87 C9.2 ; U3.1@6361.35,2034.07 6361.35,2015.5 6369.36,2007.49 v1@6385.01,2007.49 ; v1(6387.5,2005) 6425,2042.5
  Bottom Layer w12: C1.2 v1(3575,2495) ; U2.8@3658.59,2299.99 U2.8 ; v1(5932.5,2245) 5932.5,2117.5 5933.75,2116.25 Q2.2@5936.25,2116.25
  Bottom Layer w13: v1(3575,2495) 3575,2600 3655,2680 3697.05,2680 3727.05,2710 C13.1 ; U1.8 6315,3993.86 6319.91,3988.95 6320.55,3988.95 6345,3964.5 C2.2 v2(6345,3860) ; C4.2 6362.97,4317.03 6362.97,4224.32 U1.2 6365,4170 v2(6370,4165)
GPIO01: J3.29 U5.4 | length 3800.6
  Top Layer w10: J3.29 6846,3620.5 v1(6846,2901)
  Bottom Layer w10: U5.4 4115,2477.4 4157.6,2520 5282.29,2520 5457.29,2695 6285,2695 6340,2750 6668.43,2750 6672.24,2749.55 ccw(c6677,2789.5) 6681.76,2749.55 6685.57,2750 6769.34,2750 ccw(c6777,2789.5) 6778.84,2749.31 6794.4,2750 6846,2801.6 v1(6846,2901)
GPIO07: J3.32
GPIO09: J1.3 J3.7 | length 4147.1
  Bottom Layer w8: J1.3 3921.95,1477.46 6457.27,1477.46 6695,1715.19 6695,1960 6671.3,1983.7
  Bottom Layer w10: 6671.3,1983.7 6671.3,2127.56 6738.47,2194.74 6755.17,2194.74 6817.24,2256.81 6817.24,2506.17 6777,2546.4 J3.7
GPIO11: J3.31
GPIO12: J3.15
GPIO13: J3.33 Q2.1 R6.1 | length 2559.3
  Top Layer w12: J3.33 6780.68,3885.82 6780.68,3844.14 6818.24,3806.58 6818.24,3772.42 6785.32,3739.5 6768.68,3739.5 6735.76,3706.58 6735.76,3672.42 6759.92,3648.26 6792.74,3648.26 6820.5,3620.5 6820.5,2731.5 v1@6819,2730
  Bottom Layer w9.84: R6.1@5860,2171.5 5860,2220
  Bottom Layer w10: 5860,2220 6369.74,2729.74 6793.67,2729.74 6794.28,2729.13 6812.39,2729.13 v1(6815.26,2726.26)
  Bottom Layer w12: Q2.1@5857.5,2098.5 R6.1@5857.5,2166
NetC5_2: C5.2 R1.2 R3.2 | length 353
  Top Layer w9.84: v1(3349.95,2197.55) v1(3475,2197.5)
  Bottom Layer w9.84: 3287.5,2222.5 3287.5,2197.5 v1(3349.95,2197.55)
  Bottom Layer w10: C5.2@3212.5,2230 C5.2 3280,2230 3287.5,2222.5 ; v1(3475,2197.5) R1.2@3537.45,2197.45
NetC6_2: C6.2 R2.2 R4.2 | length 350.4
  Top Layer w9.84: v1(3662.5,2197.5) v1(3787.5,2197.5)
  Bottom Layer w10: R4.2@3603.94,2197.5 v1(3662.5,2197.5) ; v1(3787.5,2197.5) 3787.5,2197.4 R2.2 3850,2222.5 3860,2232.5 C6.2@3925,2232.5
NetC7_1: C7.1 U3.2 | length 113.5
  Bottom Layer w10: U3.2@6335,2045.67 6335,1995 6350,1980 6350,1952.5 C7.1
NetC7_2: C7.2 U3.4 | length 109.1
  Bottom Layer w10: U3.4@6280.29,2047.31 6280.29,2015.36 6280,2015.07 6280,1990.31 6290,1980.31 C7.2
NetC8_1: C8.1 U3.3 | length 189.2
  Bottom Layer w10: U3.3 6313.6,2051.28 6313.6,2079.04 6364.56,2130 6434.29,2130 C8.1
NetC10_1: C10.1 U3.7 | length 156.1
  Bottom Layer w10: C10.1 6185,2107.5 6205,2087.5 U3.7@6205,2044.73
NetC11_1: C11.1 U3.5 | length 128
  Bottom Layer w10: C11.1@6210,1942.5 6210,1947.5 6220,1957.5 6225,1957.5 6258.56,1991.06 U3.5
NetC11_2: C11.2 U3.6 | length 169.9
  Bottom Layer w10: C11.2@6140,1942.5 6140,1947.5 6172.5,1980 6212.5,1980 6235,2002.5 U3.6@6235,2049.65
NetJ2_1: J2.1 Q1.2 | length 830.3
  Bottom Layer w10: Q1.2 5936.35,1870 5942.35,1864 5942.35,1862.65 6165,1640 6486.85,1640 J2.1
NetJ2_2: J2.2 U3.13 | length 1184.2
  Bottom Layer w10: U3.13@6285,2289.84 6281.9,2286.74 6281.9,2249.4 6262.5,2230 6062.5,2230 6040.5,2208 6040.5,1899.5 6240,1700 6448.43,1700 J2.2
NetJ2_3: J2.3 U3.8 | length 636.8
  Bottom Layer w10: U3.8@6172.93,2047.42 6075.39,2047.42 6069.53,2041.56 6069.53,1915.47 6095,1890 6280,1890 J2.3
NetJ4_1: J4.1 U6.4 | length 195.3
  Bottom Layer w9.84: U6.4@3206.61,4443.23 J4.1@3206.61,4638.54
NetJ4_2: J4.2 U6.5 | length 196.3
  Bottom Layer w9.84: U6.5@3282.4,4442.24 J4.2@3282.4,4638.54
NetJ5_1: J5.1 SW2.2 U2.6 | length 803.9
  Bottom Layer w9.84: 3760,1990 SW2.2@3796.02,1990
  Bottom Layer w10: J5.1 3508.43,1804.73 3630.27,1804.73 3728.54,1903 3728.54,1922.52 3796.02,1990 SW2.2 ; 3760,1990 U2.6@3760,2300
NetJ5_2: J5.2 SW2.5 U2.7 | length 864.8
  Bottom Layer w10: J5.2 3423.55,1818.27 3624.66,1818.27 3715,1908.61 3715,1990 ; SW2.5 3715,1990 ; U2.7@3715,2302.18 3715,1990
NetJ5_4: J5.4 SW1.2 U1.6 | length 7685.5
  Top Layer w10: v2(3355,2445) 3355,2443.7 3415.4,2383.3 v2(3415.4,2382)
  Bottom Layer w8: v2(3355,2445) 3325,2445 3040,2730 3040,4180 3165,4305 3165,4498.68 3078.46,4585.22 3078.46,4708.46 3195,4825 6185,4825 6290,4720 6290,4149.45 6415,4024.45 U1.6
  Bottom Layer w10: J5.4 3240.24,1831.82 3475.6,1831.82 3543.78,1900 3543.78,1984.14 3537.92,1990 3443.36,1990 3415.4,2017.95 v2(3415.4,2382)
NetJ5_5: J5.5 SW1.5 U1.7 | length 7661.9
  Top Layer w10: v2(3370,2380) 3396,2354 3427,2354 3443.4,2370.4 3443.4,2416.6 v2(3410,2450)
  Bottom Layer w8: v2(3410,2450) 3407.7,2452.3 3385.88,2452.3 3366.18,2472 3323,2472 3055.86,2739.14 3055.86,4170.86 3180,4295 3180,4500 3090,4590 3090,4700 3200,4810 6180,4810 6275,4715 6275,4110 6353.94,4031.06 6354.16,4031.06 6365,4020.22 U1.7
  Bottom Layer w9.84: SW1.5 3400,1990
  Bottom Layer w10: J5.5 3180,1870 3360,1870 3400,1910 3400,1990 3400,2245 3370,2275 v2(3370,2380)
NetQ1_1: Q1.1 Q2.3 R5.2 | length 272.3
  Bottom Layer w10: R5.2@5754.64,1977.36 5814.86,1977.36 5845,2007.5 Q2.3@5890,2007.5 ; Q2.3@5895,2005.51 5930.2,2005.51 5937.23,1998.49 Q1.1@5937.23,1950
  Bottom Layer w12: Q2.3@5895,2005.51 Q2.3@5895,2012.5 ; Q1.1@5923.5,1945 5932.23,1945 Q1.1@5937.23,1950 ; Q2.3@5895,2012.5 5895,2016.5 Q2.3@5895,2012.5
NetR1_1: R1.1 SW1.1 | length 128.1
  Bottom Layer w10: SW1.1 3499.35,2058.9 3514.03,2073.58 3514.03,2085.09 3536.68,2107.74 R1.1@3536.68,2160
NetR2_1: R2.1 SW2.1 | length 127.6
  Bottom Layer w10: SW2.1 3819.35,2058.9 3834.03,2073.58 3834.03,2085.09 3834.94,2086 3834.94,2148.87 3846.06,2160 R2.1
NetR3_1: R3.1 SW1.4 | length 142.8
  Bottom Layer w12: R3.1@3290,2156.05 3290,2070 3299.7,2060.3 3340.76,2060.3 SW1.4
NetR4_1: R4.1 SW2.4 | length 156.7
  Bottom Layer w12: R4.1 3603.94,2160.1 3608.76,2155.27 3608.76,2071.24 3619.7,2060.3 3654.7,2060.3 SW2.4@3662.77,2052.23
SPI0_CS0: J3.24 U5.13 | length 3595.6
  Bottom Layer w10: U5.13 4015,2652.6 4072.6,2595 4290,2595 4405,2710 6274,2710 6493.74,2929.74 6818.74,2929.74 6854,2965 6854,3320 6826,3348 6718.5,3348 J3.24
SPI0_CS1: J3.26
SPI0_MISO: J3.21 U5.12 | length 3019.1
  Bottom Layer w10: U5.12 4087.33,2671.3 4093.19,2677.16 4093.19,2707.34 4102.41,2716.56 4145.85,2760 6246.99,2760 6630.27,3143.28 6687.68,3143.28 6728.06,3183.66 6728.06,3197.46 6777,3246.4 J3.21
SPI0_MOSI: J3.19 U5.11 | length 2898
  Bottom Layer w10: U5.11@4115.95,2672.25 4115.95,2710.95 4125,2720 4188.08,2720 4213.08,2745 6260.7,2745 6645.43,3129.74 6717.24,3129.74 J3.19
SPI0_SCK: J3.23 U5.10 | length 3559.3
  Bottom Layer w10: U5.10@4168.47,2674.77 4168.47,2691.66 4171.81,2695 4187.33,2695 4193.19,2700.86 4193.19,2705.95 4199.05,2711.81 4204.14,2711.81 4222.33,2730 6273,2730 6486.28,2943.28 6810.74,2943.28 6840.46,2973 6840.46,3282.95 6788.95,3334.46 6675.14,3334.46 6636.76,3372.83 6636.76,3406.17 6660.33,3429.74 6693.67,3429.74 6733.9,3389.5 J3.23
SPI1_CS0: J3.18
SPI1_CS1: J3.16
SPI1_MISO: J3.22
SPI1_MOSI: J3.37
SPI1_SCK: J3.13
UART2_RX: U6.3 Uart.TP | length 236.3
  Top Layer w9.84: Uart.TP 3182.1,4137.1 3182.1,4191.1 v1(3185,4194)
  Bottom Layer w9.84: v1(3185,4194) 3204.88,4213.88 3204.88,4350.04 U6.3
uart_rx: J3.10 U3.9 | length 807.7
  Bottom Layer w9.84: U3.9 6181.79,2500.79 6396,2715 6651.08,2715 6676.58,2689.5 J3.10
uart_tx: J3.8 U3.11 | length 804.5
  Bottom Layer w10: U3.11 6232.97,2530.97 6403.54,2701.54 6564.96,2701.54 J3.8
pads on no net: J3.3 J3.5 J3.11 J3.12 J3.27 J3.28 J3.35 J3.36 J3.38 J3.40 SW1.3 SW1.6 SW2.3 SW2.6 U3.10 U5.3 U5.5 U5.6 U5.8 U5.9

## Polygon pours and split planes (outlines as drawn)
GND on Top Layer "GND_L01_P000" (solid, remove dead copper, pour order 0): 2890,4935 6945,4935 6945,1375 2890,1375

## Keep-outs
Keep-Out Layer:
  circle w10: c6777,2091 r87.05
  circle w10: c6777,4388 r87.05
  circle w10: c3058,2091 r87.05
  circle w10: c3058,4388 r87.05

## Silkscreen, mask and mechanical layers (free items; w line width, h text height)
Top Overlay:
  text "CAN" at 6371.89,4691.01 h90
  text "TX" at 6420.8,4575 h30
  text "RX" at 6519.22,4575 h30
  text "RX" at 6385.01,1663 h30
  text "TX" at 6483.43,1663 h30
  text "FAN" at 3685.04,1500.01 h90
  text "IMU" at 6358.54,1497.01 h90
  text "CAN" at 3141.89,1495.01 h90
Bottom Overlay:
  text "ON" at 3953,2048 h30
  text "ON" at 3270,2047 h30
  text "TERM / OFF" at 4059.96,1945 h30
  text "TERM / OFF" at 3344.96,1930 h30